# Altium PCB PCB1.PcbDoc (part 1 of 2)
Units mm, origin at the board's own origin, x right, y up, seen from the top; angles counter-clockwise.
Board outline 150 x 44.29 mm, 2 copper layers (Component Side, Solder Side), stack 0.772 mm thick; 82 components, 158 nets, 515 pads, 151 vias.
Unrouted connection lines stored in the file: 1.
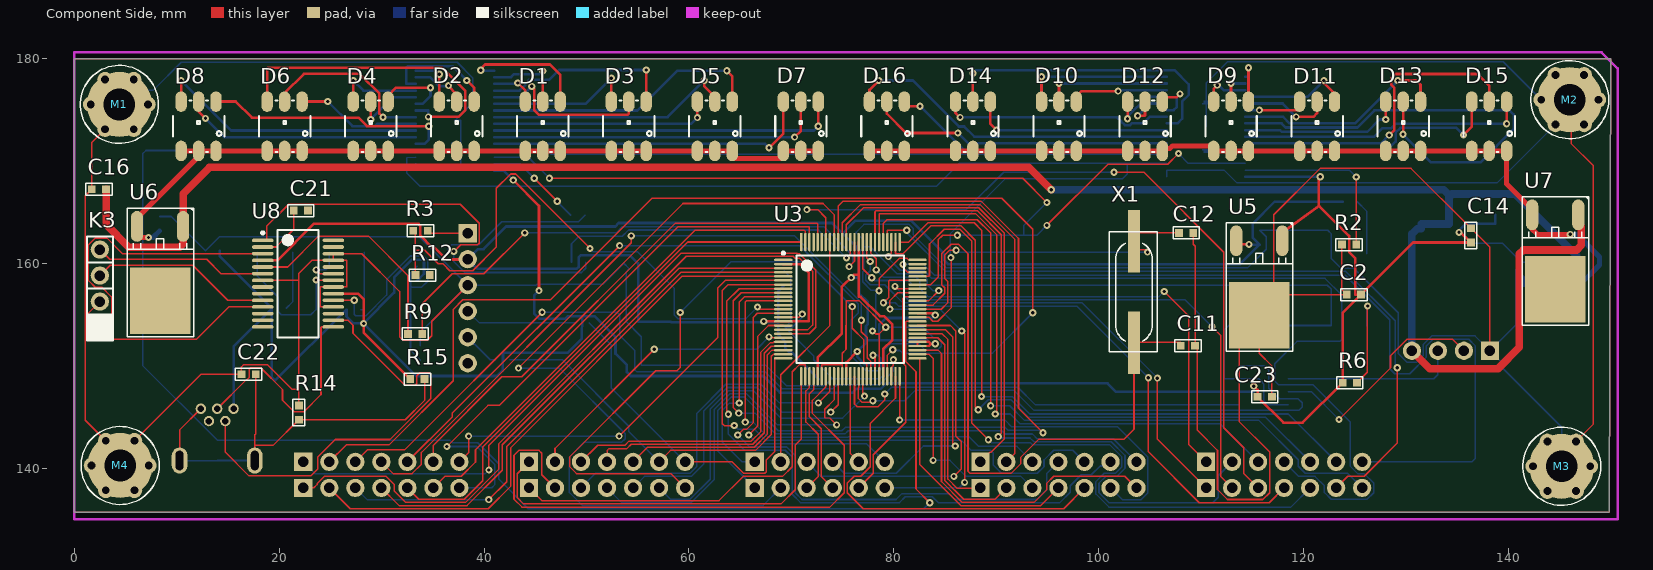
[diagram p0: Component Side view]
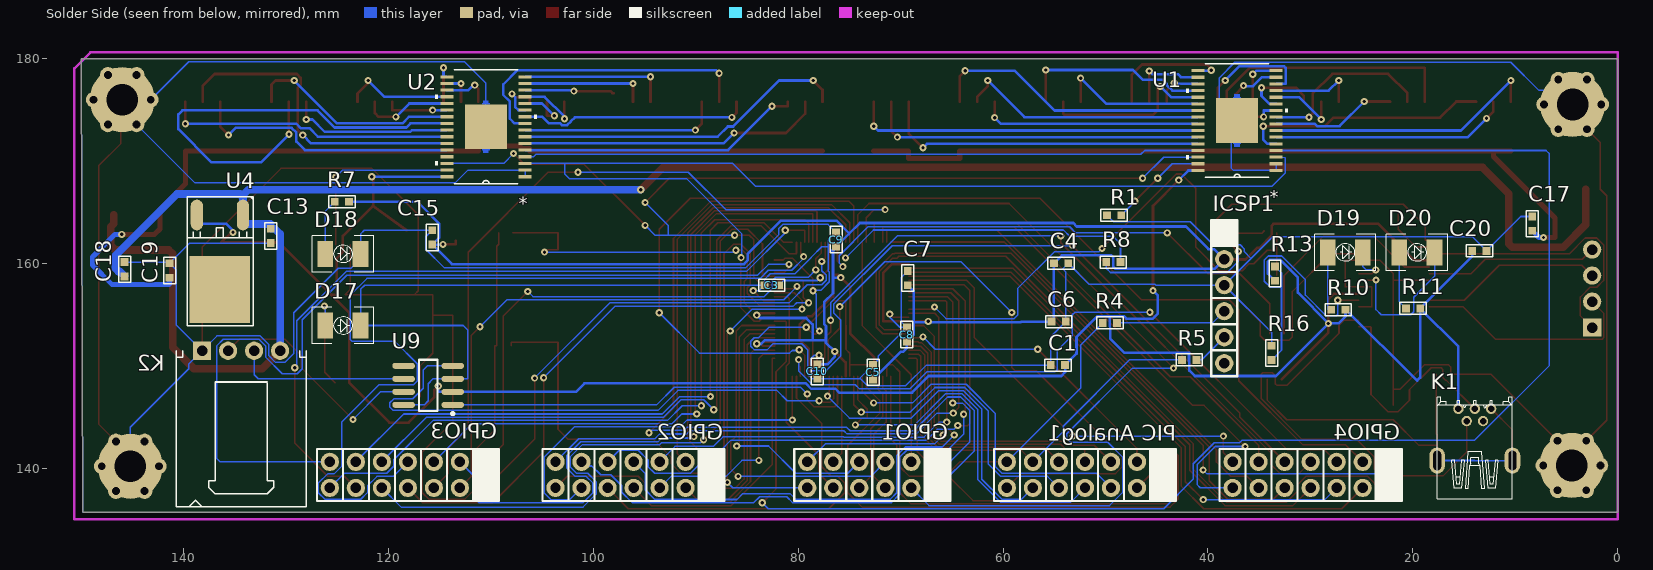
[diagram p1: Solder Side view, seen from below]

## Layer stack, top to bottom
Top Solder: solder mask 0.0102, Solder Resist, Dk 3.5
Component Side: signal copper 0.0356
Dielectric 1: core 0.32, FR-4, Dk 4.454
Dielectric 3: core 0.127, FR-4, Dk 4.454
Dielectric 4: core 0.254, FR-4, Dk 4.454
Solder Side: signal copper 0.0356
Bottom Solder: solder mask 0.0102, Solder Resist, Dk 3.5

## Board outline
0,180 150,180 149.86,135.712 0,135.712

## Design rules (kind name [scope] priority, off if disabled: settings)
AcuteAngle [All] p1: minimum=6.00000000000000E+0001 checktracksonly=FALSE
Clearance [All] p1: gap=0.152
FanoutControl Fanout_Default [All] p5: bgadir=Out bgaviamode=Centered fanoutstyle=Auto fanoutdirection=InThenOut viagrid=0.025 // Fanout_Default (Default Rule)
HoleSize [All] p1: absolutevalues=TRUE maxlimit=4 minlimit=0.152 maxpercent=80.000 minpercent=20.000
MinimumAnnularRing [All] p1: minimumring=0.178
MinimumSolderMaskSliver [All] p1: minsoldermaskwidth=0.154
PolygonConnect [All] p1: connectstyle=Relief reliefconductorwidth=0.254 reliefentries=4 polygonreliefangle="90 Angle" airgapwidth=0.254
RoutingVias [All] p1: holewidth=0.33 width=0.7 viastyle="Through Hole" minholewidth=0.33 minwidth=0.7 maxholewidth=0.33 maxwidth=1
SMDNeckDown [All] p1: percent=100.000
SolderMaskExpansion [All] p1: expansion=0
UnRoutedNet [InNet('VCC')] p1:
Width Width_1 [InNetClass('LEDGnd')] p1: maxlimit=0.254 minlimit=0.254 preferedwidth=0.254
Width LED2 [InNet('LEDPWR1')] p2: maxlimit=0.5 minlimit=0.254 preferedwidth=0.5
Width LED1 [InNet('LEDPWR2')] p3: maxlimit=0.5 minlimit=0.254 preferedwidth=0.5
Width "Input Power" [InNetClass('InputPower')] p4: maxlimit=0.75 minlimit=0.254 preferedwidth=0.75
Width "PIC Power Class" [InNetClass('PICPower')] p5: maxlimit=0.208 minlimit=0.208 preferedwidth=0.208
Width "Power class" [InNetClass('Power')] p6: maxlimit=0.254 minlimit=0.2 preferedwidth=0.254
Width [All] p7: maxlimit=0.5 minlimit=0.152 preferedwidth=0.152
25 further rules are at their usual default settings.

## Classes and differential pairs
net class LEDGnd: NetD1_4 NetD1_5 NetD1_6 NetD2_4 NetD2_5 NetD2_6 NetD3_4 NetD3_5 NetD3_6 NetD4_4 NetD4_5 NetD4_6 NetD5_4 NetD5_5 NetD5_6 NetD6_4 NetD6_5 NetD6_6 NetD7_4 NetD7_5 NetD7_6 NetD8_4 NetD8_5 NetD8_6 NetD9_4 NetD9_5 NetD9_6 NetD10_4 NetD10_5 NetD10_6 NetD11_4 NetD11_5 NetD11_6 NetD12_4 NetD12_5 NetD12_6 NetD13_4 NetD13_5 NetD13_6 NetD14_4 NetD14_5 NetD14_6 NetD15_4 NetD15_5 NetD15_6 NetD16_4 NetD16_5 NetD16_6
component class PIC32: C3 C4 C5 C6 C7 C8 C9 C10 C11 C12 GPIO1 GPIO2 GPIO3 GPIO4 ICSP1 "PIC Analog1" R3 R4 R5 U3 X1
net class Power: 3V3 LEDPWR1 LEDPWR2 VCC
net class InputPower: INPUTPOWER
component class USB_UART: C20 C21 C22 D19 D20 K1 K3 R8 R9 R10 R11 R12 R13 R14 R15 R16 TP5 TP6 TP7 U8
component class PowerSupply: C13 C14 C15 C16 C17 C18 C19 D17 D18 R6 R7 TP1 TP2 TP3 TP4 U4 U5 U6 U7
component class CanTransceiver: C23 K2 U9
component class "LED Driver": C1 C2 D1 D2 D3 D4 D5 D6 D7 D8 D9 D10 D11 D12 D13 D14 D15 D16 R1 R2 U1 U2
component class mechanical: M1 M2 M3 M4

## Components (designator, comment, footprint, x,y, rotation, side; value= is the part's Value field where it differs from the comment)
C1 "10uF" 0603C-GENERIC 53.95,150.089 r0 bottom
C2 "10uF" 0603C-GENERIC 125.628,156.972 r180 top
C3 "10uF" 0603C-GENERIC 81.89,157.886 r0 bottom
C4 "1uF" 0603C-GENERIC 55.042,160.02 r180 bottom
C5 "1uF" 0603C-GENERIC 72.695,148.692 r90 bottom
C6 "1uF" 0603C-GENERIC 55.27,154.33 r180 bottom
C7 "1uF" 0603C-GENERIC 69.317,157.886 r90 bottom
C8 "1uF" 0603C-GENERIC 69.393,152.375 r90 bottom
C9 "1uF" 0603C-GENERIC 76.302,161.646 r90 bottom
C10 "1uF" 0603C-GENERIC 78.13,150.165 r270 bottom
C11 "1nF" 0603C-GENERIC 108.026,151.968 r0 top
C12 "1nF" 0603C-GENERIC 107.848,162.992 r0 top
C13 "1nF" 0603C-GENERIC 131.496,163.398 r270 bottom
C14 "1nF" 0603C-GENERIC 136.347,162.052 r90 top
C15 "1nF" 0603C-GENERIC 115.722,161.849 r90 bottom
C16 "1nF" 0603C-GENERIC 3.099,167.259 r180 top
C17 "1nF" 0603C-GENERIC 8.331,163.195 r90 bottom
C18 "1nF" 0603C-GENERIC 145.771,158.75 r90 bottom
C19 "1nF" 0603C-GENERIC 141.376,158.623 r90 bottom
C20 "1nF" 0603C-GENERIC 14.199,161.239 r180 bottom
C21 "1nF" 0603C-GENERIC 21.412,165.176 r0 top
C22 "1nF" 0603C-GENERIC 17.704,149.2 r180 top
C23 "1nF" 0603C-GENERIC 115.519,146.99 r0 top
D1 "LED" LED-TRICOLOR-5050 45.727,173.397 r90 top
D2 "LED" LED-TRICOLOR-5050 37.327,173.397 r90 top
D3 "LED" LED-TRICOLOR-5050 54.127,173.397 r90 top
D4 "LED" LED-TRICOLOR-5050 28.927,173.397 r90 top
D5 "LED" LED-TRICOLOR-5050 62.527,173.397 r90 top
D6 "LED" LED-TRICOLOR-5050 20.527,173.397 r90 top
D7 "LED" LED-TRICOLOR-5050 70.927,173.397 r90 top
D8 "LED" LED-TRICOLOR-5050 12.127,173.397 r90 top
D9 "LED" LED-TRICOLOR-5050 112.927,173.397 r90 top
D10 "LED" LED-TRICOLOR-5050 96.127,173.397 r90 top
D11 "LED" LED-TRICOLOR-5050 121.327,173.397 r90 top
D12 "LED" LED-TRICOLOR-5050 104.527,173.397 r90 top
D13 "LED" LED-TRICOLOR-5050 129.727,173.397 r90 top
D14 "LED" LED-TRICOLOR-5050 87.727,173.397 r90 top
D15 "LED" LED-TRICOLOR-5050 138.127,173.397 r90 top
D16 "LED" LED-TRICOLOR-5050 79.327,173.397 r90 top
D17 "TOPLED-GREEN" TOPLED-GREEN 126.162,153.949 r180 bottom
D18 "TOPLED-GREEN" TOPLED-GREEN 126.162,160.949 r180 bottom
D19 "TOPLED-RED" TOPLED-RED 28.305,161.094 r180 bottom
D20 "TOPLED-RED" TOPLED-RED 21.305,161.094 r180 bottom
GPIO1 "HEADER-2X6" HEADER-2X6 66.421,140.64 r270 bottom
GPIO2 "HEADER 2X7" HEADER-2X7#1 88.456,138.1 r90 bottom
GPIO3 "HEADER 2X7" HEADER-2X7#2 110.49,140.64 r270 bottom
GPIO4 "HEADER 2X7" HEADER-2X7#1 22.352,138.1 r90 bottom
ICSP1 "HEADER-1X6" HEADER-1X6 38.405,162.966 r180 bottom
K1 "H2960" usb-mini-b 15.545,145.821 r90 bottom
K2 "CGRID4-H" CGRID-4H 138.201,151.486 r270 bottom
K3 "HEADER-1X4" HEADER-1X4 2.489,153.746 r180 top
M1 "M" MOUNTING 4.394,175.539 r0 top
M2 "M" MOUNTING 146,176 r0 top
M3 "M" MOUNTING 145.212,140.208 r0 top
M4 "M" MOUNTING 4.47,140.284 r0 top
"PIC Analog1" "HEADER 2X7" HEADER-2X7#2 44.386,140.64 r270 bottom
R1 "1230" 0603R-TBD 48.463,164.719 r0 bottom
R2 "1230" 0603R-TBD 125.146,161.849 r180 top
R3 "50" 0603R-TBD 34.493,163.195 r180 top
R4 "50" 0603R-TBD 50.267,154.203 r180 bottom
R5 "50" 0603R-TBD 41.123,150.597 r0 bottom
R6 "1K" 0603R-1k 123.825,148.361 r0 top
R7 "1K" 0603R-1k 123.85,166.04 r0 bottom
R8 "1K" 0603R-1k 49.936,160.147 r180 bottom
R9 "1K" 0603R-1k 32.575,153.137 r0 top
R10 "1K" 0603R-1k 27.965,155.499 r180 bottom
R11 "1K" 0603R-1k 20.676,155.626 r180 bottom
R12 "1K" 0603R-1k 34.696,158.877 r180 top
R13 "4.7k" 0603R-1k 33.452,158.318 r90 bottom
R14 "1K" 0603R-1k 21.92,144.755 r90 top
R15 "1K" 0603R-1k 32.791,148.717 r0 top
R16 "10k" 0603R-1k 33.782,150.571 r90 bottom
U1 "TLC5947_DAP_32" DAP32_4P36X4P11 37.16,173.965 r0 bottom
U2 "TLC5947_DAP_32" DAP32_4P36X4P11 110.49,173.355 r0 bottom
U3 "PIC32MX795F512L-80I/PT" TQFP-PT100_N 75.768,155.55 r0 top
U4 "L7805" DPAK 134.214,164.744 r270 bottom
U5 "LF33CDT" DPAK 117.932,162.23 r270 top
U6 "L7805" DPAK 10.617,163.627 r270 top
U7 "L7805" DPAK 146.822,164.753 r270 top
U8 "FT232RL-Tray" SSOP-28_N 21.844,158.039 r0 top
U9 "MCP2551T-I/SN" SOIC-SN8_N 116.129,148.107 r0 bottom
X1 "CRYSTAL-GENERIC" XTAL-RU49/4 103.454,152.286 r90 top

## Footprints (in the part's own frame and the unit in brackets; to place one, negate y for a bottom-side part, rotate by r counter-clockwise, add the part's x,y. Pads: shape width x height; smd on the part's side, far side on the other; paste and mask are expansions set on the pad)
0603C-GENERIC [mil] "CAPACITOR 0603"
  rect 30x30 smd: 1(0,0) 2(55,0)
  silkscreen extent -23,-23 78,23, body extent -4,-15 59,15, height 19
0603R-1k [mil] "RESISTOR 0603"
  rect 30x30 smd: 1(0,0) 2(55,0)
  silkscreen extent -23,-23 78,23, body extent -4,-15 59,15, height 20
0603R-TBD [mil] "RESISTOR 0603 VALUE TO BE DETERMINED"
  rect 30x30 smd: 1(0,0) 2(55,0)
  silkscreen extent -23,-23 78,23, body extent -4,-15 59,15, height 20
CGRID-4H [mil]
  rect 70x70 hole 40: 1(0,0)
  round 70 hole 40: 2(0,100) 3(0,200) 4(0,300)
  silkscreen extent 0,-100 600,400
DAP32_4P36X4P11 [mil]
  rect 50x12 smd: 1(-150.5,191.93) 2(-150.5,166.34) 3(-150.5,140.75) 4(-150.5,115.16) 5(-150.5,89.57) 6(-150.5,63.98) 7(-150.5,38.39) 8(-150.5,12.8) 9(-150.5,-12.8) 10(-150.5,-38.39) 11(-150.5,-63.98) 12(-150.5,-89.57) 13(-150.5,-115.16) 14(-150.5,-140.75) 15(-150.5,-166.34) 16(-150.5,-191.93) 17(150.5,-191.93) 18(150.5,-166.34) 19(150.5,-140.75) 20(150.5,-115.16) 21(150.5,-89.57) 22(150.5,-63.98) 23(150.5,-38.39) 24(150.5,-12.8) 25(150.5,12.8) 26(150.5,38.39) 27(150.5,63.98) 28(150.5,89.57) 29(150.5,115.16) 30(150.5,140.75) 31(150.5,166.34) 32(150.5,191.93)
  rect 161.81x171.65 smd: 33(0,0)
  Component Side region: 13.78,-85.83 -13.78,-85.83 -13.78,-89.76 -9.84,-89.76 -9.84,-100.39 9.84,-100.39 9.84,-89.76 13.78,-89.76
  Component Side region: 13.78,85.83 -13.78,85.83 -13.78,89.76 -9.84,89.76 -9.84,100.39 9.84,100.39 9.84,89.76 13.78,89.76
  silkscreen extent -196,-218 196,218
DPAK [mm]
  oval 3x1.2 smd: 1(0,0) 3(0,-4.5)
  rect 6.5x5.9 smd: 2(7.275,-2.25)
  silkscreen extent -1.78,-5.46 10.79,1.02, body extent -0.5,-5.48 9.44,1.06, height 2.41
HEADER-1X4 [mil]
  rect 70x70 hole 40: 1(0,0)
  round 70 hole 40: 2(0,-100) 3(0,-200) 4(0,-300)
  silkscreen extent -51,-350 50,50, body extent -50,-350 50,50, height 470
HEADER-1X6 [mil]
  rect 70x70 hole 40: 1(0,0)
  round 70 hole 40: 2(0,-100) 3(0,-200) 4(0,-300) 5(0,-400) 6(0,-500)
  silkscreen extent -50,-550 50,50, body extent -50,-550 50,50, height 470
HEADER-2X6 [mil]
  rect 70x70 hole 40: 1(0,0) 2(100,0)
  round 70 hole 40: 3(0,-100) 4(100,-100) 5(0,-200) 6(100,-200) 7(0,-300) 8(100,-300) 9(0,-400) 10(100,-400) 11(0,-500) 12(100,-500)
  silkscreen extent -50,-550 150,50, body extent -50,-550 150,50, height 470
HEADER-2X7#1 [mil]
  rect 70x70 hole 40: 1(0,0) 2(100,0)
  round 70 hole 40: 3(0,100) 4(100,100) 5(0,200) 6(100,200) 7(0,300) 8(100,300) 9(0,400) 10(100,400) 11(0,500) 12(100,500) 13(0,600) 14(100,600)
  silkscreen extent -50,-50 150,650, body extent -50,-50 150,650, height 470
HEADER-2X7#2 [mil]
  rect 70x70 hole 40: 1(0,0) 2(100,0)
  round 70 hole 40: 3(0,-100) 4(100,-100) 5(0,-200) 6(100,-200) 7(0,-300) 8(100,-300) 9(0,-400) 10(100,-400) 11(0,-500) 12(100,-500) 13(0,-600) 14(100,-600)
  silkscreen extent -50,-650 150,50, body extent -50,-650 150,50, height 470
LED-TRICOLOR-5050 [mil]
  rrect100% 79x44 smd: 1(-94.49,-67) 2(-94.49,0) 3(-94.49,66.93) 4(95,66.93) 5(95,0) 6(95,-67)
  silkscreen extent -98,-99 99,98
MOUNTING [mil]
  round 250 hole 122.05: 1(0,0)
  round 60 hole 30: 2(-55,95.26) 3(55,95.26) 4(110,0) 5(55,-95.26) 6(-55,-95.26) 7(-110,0)
  silkscreen extent -150,-150 150,150
SOIC-SN8_N [mm] "SOIC, 8-Leads, Body 4.9x3.8mm, Pitch 1.27mm, IPC Medium Density"
  oval 2.2x0.6 smd: 1(-2.4,1.905) 2(-2.4,0.635) 3(-2.4,-0.635) 4(-2.4,-1.905) 5(2.4,-1.905) 6(2.4,-0.635) 7(2.4,0.635) 8(2.4,1.905)
  silkscreen extent -2.52,-2.5 0.9,2.88, body extent -2,-2.5 2,2.5, height 1.75
SSOP-28_N [mm] "SOP, 28-Leads, Body 10.2x5.3mm, Pitch 0.65mm, IPC Medium Density"
  oval 2.1x0.35 smd: 1(-3.45,4.225) 2(-3.45,3.575) 3(-3.45,2.925) 4(-3.45,2.275) 5(-3.45,1.625) 6(-3.45,0.975) 7(-3.45,0.325) 8(-3.45,-0.325) 9(-3.45,-0.975) 10(-3.45,-1.625) 11(-3.45,-2.275) 12(-3.45,-2.925) 13(-3.45,-3.575) 14(-3.45,-4.225) 15(3.45,-4.225) 16(3.45,-3.575) 17(3.45,-2.925) 18(3.45,-2.275) 19(3.45,-1.625) 20(3.45,-0.975) 21(3.45,-0.325) 22(3.45,0.325) 23(3.45,0.975) 24(3.45,1.625) 25(3.45,2.275) 26(3.45,2.925) 27(3.45,3.575) 28(3.45,4.225)
  silkscreen extent -3.57,-5.25 2,5.25, body extent -2.8,-5.25 2.8,5.25, height 2
TOPLED-GREEN [mil]
  rect 60x100 smd: A(0,0) K(135,0)
  silkscreen extent -50,-70 185,70, body extent -20,-60 154,60, height 75
TOPLED-RED [mil]
  rect 60x100 smd: A(0,0) K(135,0)
  silkscreen extent -50,-70 185,70, body extent -20,-60 154,60, height 75
TQFP-PT100_N [mm] "Thin QFP, 100-Leads, Body 12x12mm, Pitch 0.4mm, IPC Medium Density"
  oval 1.8x0.24 smd: 1(-6.55,4.8) 2(-6.55,4.4) 3(-6.55,4) 4(-6.55,3.6) 5(-6.55,3.2) 6(-6.55,2.8) 7(-6.55,2.4) 8(-6.55,2) 9(-6.55,1.6) 10(-6.55,1.2) 11(-6.55,0.8) 12(-6.55,0.4) 13(-6.55,0) 14(-6.55,-0.4) 15(-6.55,-0.8) 16(-6.55,-1.2) 17(-6.55,-1.6) 18(-6.55,-2) 19(-6.55,-2.4) 20(-6.55,-2.8) 21(-6.55,-3.2) 22(-6.55,-3.6) 23(-6.55,-4) 24(-6.55,-4.4) 25(-6.55,-4.8) 51(6.55,-4.8) 52(6.55,-4.4) 53(6.55,-4) 54(6.55,-3.6) 55(6.55,-3.2) 56(6.55,-2.8) 57(6.55,-2.4) 58(6.55,-2) 59(6.55,-1.6) 60(6.55,-1.2) 61(6.55,-0.8) 62(6.55,-0.4) 63(6.55,0) 64(6.55,0.4) 65(6.55,0.8) 66(6.55,1.2) 67(6.55,1.6) 68(6.55,2) 69(6.55,2.4) 70(6.55,2.8) 71(6.55,3.2) 72(6.55,3.6) 73(6.55,4) 74(6.55,4.4) 75(6.55,4.8)
  oval 0.24x1.8 smd: 26(-4.8,-6.55) 27(-4.4,-6.55) 28(-4,-6.55) 29(-3.6,-6.55) 30(-3.2,-6.55) 31(-2.8,-6.55) 32(-2.4,-6.55) 33(-2,-6.55) 34(-1.6,-6.55) 35(-1.2,-6.55) 36(-0.8,-6.55) 37(-0.4,-6.55) 38(0,-6.55) 39(0.4,-6.55) 40(0.8,-6.55) 41(1.2,-6.55) 42(1.6,-6.55) 43(2,-6.55) 44(2.4,-6.55) 45(2.8,-6.55) 46(3.2,-6.55) 47(3.6,-6.55) 48(4,-6.55) 49(4.4,-6.55) 50(4.8,-6.55) 76(4.8,6.55) 77(4.4,6.55) 78(4,6.55) 79(3.6,6.55) 80(3.2,6.55) 81(2.8,6.55) 82(2.4,6.55) 83(2,6.55) 84(1.6,6.55) 85(1.2,6.55) 86(0.8,6.55) 87(0.4,6.55) 88(0,6.55) 89(-0.4,6.55) 90(-0.8,6.55) 91(-1.2,6.55) 92(-1.6,6.55) 93(-2,6.55) 94(-2.4,6.55) 95(-2.8,6.55) 96(-3.2,6.55) 97(-3.6,6.55) 98(-4,6.55) 99(-4.4,6.55) 100(-4.8,6.55)
  silkscreen extent -6.67,-5.25 5.25,5.59, body extent -6,-6 6,6, height 1.2
usb-mini-b [mil]
  round 40 hole 25: 1(0,0) 2(-47.24,-31.5) 3(0,-62.99) 4(-47.24,-94.49) 5(0,-125.98)
  oval 100x60 hole 30 slot 75 at 0 deg: M1(-198.82,-207.68) M2(-198.82,81.69)
  silkscreen extent -348,-207 44,82, body extent -345,-214 9,89, height 162
XTAL-RU49/4 [mil]
  rect 240x47.24 smd: 1(0,0) 2(390,0)
  silkscreen extent -35,-90 425,95, body extent -78,-90 468,95, height 120

## Part data
C1 C2: library part 0603C-10UF-10V-X5R-TDK, "CAPACITOR 0603 CERAMIC"
C3 C4 C5 C6 C7 C8 C9 C10: library part 0603C-1UF-35V-X5R-TAY, "CAPACITOR 0603 CERAMIC"
C11 C12 C13 C14 C15 C16 C17 C18 C19 C20 C21 C22 C23: library part 0603C-000, "CAPACITOR 0603 CERAMIC"
D1 D2 D3 D4 D5 D6 D7 D8 D9 D10 D11 D12 D13 D14 D15 D16: library part "RGB LED"
GPIO2 GPIO3 GPIO4 "PIC Analog1": library part HEADER-2X7
K1: library part USB-H2960, "MINI USB B DEVICE CONNECTOR"
K2: "MOLEX GC/WALDOM CGRID CONNECTOR 4 PIN"
M1 M2 M3 M4: library part MOUNTING, "MOUNTING HOLE - NON INSTALLABLE"
R1 R2 R3 R4 R5: library part 0603R-TBD, "RESISTOR 0603 VALUE TO BE DETERMINED"
R6 R7 R8 R9 R10 R11 R12 R13 R14 R15 R16: library part 0603R-1K, "GENERIC RESISTOR 0603"
U1 U2: "Imported"
U3: "High Performance 80 MHz MIPS-Based 32-Bit Flash Microcontroller with USB, CAN and Ethernet, 512KB Program Memory, 100-pin TQFP, Industrial Temperature"
U4 U6 U7: library part L7805-DPAK, "LINEAR REGULATOR 5.0V"
U5: "Low Drop Voltage Regulator 3.3V"
U8: "USB UART Asynchronous Serial Data Transfer Chip, SSOP-28, Tray"
U9: "High-Speed CAN Transceiver, 8-Pin SOIC, Industrial Temperature, Tape and Reel"
X1: "GENERIC CRYSTAL"

## Via types
v1: diameter 0.7, hole 0.33, Component Side to Solder Side, 151 vias

## Nets (pads, with @x,y where several pads share a name; then routed paths per layer and width w, separated by ;. In a path a pad name is that pad's centre, name@x,y a point inside that pad or via, vN(x,y) a via of type N, cw(c..) or ccw(c..) an arc to the next point about the centre after c; other vN are vias at no path point)
3V3: C4.1 C5.1 C6.1 C7.1 C8.1 C9.1 C10.1 C15.1 ICSP1.2 R7.1 U3.2 U3.16 U3.30 U3.37 U3.46 U3.54 U3.55 U3.62 U3.86 U5.3 U8.4 | length 250.7
  Component Side w0.24: v1(67.309,154.35) U3.16@69.218,154.35 71.679,154.35 ; U3.2@69.218,159.95 70.86,159.95 ; U3.30@72.568,149 72.568,150.805 ; U3.37@75.368,149 75.368,150.356 v1(76.428,151.416) ; 76.568,158.94 U3.86@76.568,162.1 ; U3.46@78.968,149 78.968,151.638 ; U3.62@82.318,155.15 83.864,155.15 v1(84.049,154.965) ; U3.54@82.318,151.95 U3.55@82.318,152.35 83.439,152.35 83.642,152.146 83.446,151.95 U3.54@82.318,151.95
  Component Side w0.254: U8.4@18.394,160.314 19.812,160.314 23.368,163.87 33.595,163.87 33.757,163.709 33.757,162.769 34.984,161.542 35.187,161.542 36.336,160.393 37.756,160.393 38.097,160.734 ICSP1.2@38.405,160.426 ; 70.86,159.95 71.715,159.095 71.715,154.386 71.679,154.35 ; 72.568,150.805 74.905,153.142 74.905,157.691 76.116,158.902 76.53,158.902 76.568,158.94 ; 76.568,159.355 76.568,158.94 ; 78.968,151.638 79.86,152.529 79.86,154.032 79.034,154.858 78.642,154.858 76.756,156.743 76.568,156.743 76.568,158.94 ; U5.3@113.432,162.23 113.432,161.874 v1(114.681,161.874)
  Solder Side w0.254: v1(67.309,154.35) v1@67.513,154.254 ; C7.1@69.317,157.886 68.732,157.302 68.732,154.254 ; C5.1@72.695,148.692 70.002,151.384 69.774,151.384 69.393,151.765 C8.1@69.393,152.375 68.732,153.035 68.732,154.254 ; v1(75.844,158.623) 76.58,158.623 ; 77.292,152.502 78.517,152.502 ; C10.1@78.13,150.165 77.165,150.165 76.428,150.902 v1(76.428,151.416) 77.276,152.264 77.292,152.248 77.292,153.903 77.472,154.082 77.472,156.235 76.605,157.101 76.605,159.392 ; v1(84.049,152.171) 83.668,152.171 83.642,152.146 83.267,152.521 78.537,152.521 78.517,152.502 ; v1(84.049,154.965) 83.769,154.686 79.228,154.686 78.593,154.051 78.593,152.578 78.517,152.502 ; v1(114.681,161.874) 114.706,161.849 C15.1@115.722,161.849 ; R7.1@123.85,166.04 117.196,166.04 115.037,163.881 115.037,162.535 C15.1@115.722,161.849 ; v1@67.513,154.254 58.299,154.254 58.222,154.33 C6.1@55.27,154.33 55.042,154.33 C4.1@55.042,160.02 54.254,160.807 49.428,160.807 49.225,160.604 49.225,159.664 49.047,159.487 39.345,159.487 ICSP1.2@38.405,160.426 39.392,161.414 39.958,161.414 42.165,163.621 52.812,163.621 53.148,163.957 73.99,163.957 75.068,162.879 ; v1@67.513,154.254 68.732,154.254 ; 75.068,162.879 75.068,162.981 76.271,164.184 81.668,164.184 84.938,160.915 84.938,160.305 85.293,159.949 113.823,159.949 C15.1@115.722,161.849 ; 75.068,162.879 C9.1@76.302,161.646 ; C9.1@76.302,161.646 76.608,161.164 ; C9.1@76.302,161.646 76.695,161.252 76.608,161.164 ; 76.605,159.392 76.608,159.394 76.608,161.164 ; 76.605,159.392 76.605,161.162 76.608,161.164
A1: "PIC Analog1.13" R4.1 U3.25 | length 38.1
  Component Side w0.152: 59.626,140.64 64.211,140.64 65.329,139.522 67.406,139.522 67.564,139.68 67.564,140.849 68.377,141.661 68.377,150.623 68.504,150.75 U3.25@69.218,150.75
  Solder Side w0.152: R4.1@50.267,154.203 52.4,152.07 52.4,147.866 59.626,140.64
A2: "PIC Analog1.11" R5.2 U3.24 | length 40
  Component Side w0.152: 57.086,140.64 58.204,141.757 66.503,141.757 68.047,143.301 68.047,150.946 68.25,151.15 U3.24@69.218,151.15
  Solder Side w0.152: R5.2@42.52,150.597 47.648,150.597 54.127,144.117 54.127,143.599 57.086,140.64
A3: "PIC Analog1.9" U3.23 | length 23.7
  Component Side w0.152: 54.546,140.64 55.969,142.062 66.37,142.062 67.666,143.358 67.666,151.105 68.111,151.55 U3.23@69.218,151.55
A4: "PIC Analog1.7" U3.22 | length 27.1
  Component Side w0.152: 52.006,140.64 52.006,141.732 52.21,141.935 53.944,141.935 54.376,142.367 66.236,142.367 67.355,143.486 67.355,151.233 68.04,151.917 68.395,151.917 68.428,151.95 U3.22@69.218,151.95
A5: "PIC Analog1.5" U3.21 | length 29.1
  Component Side w0.152: 49.466,140.64 51.092,142.265 53.752,142.265 54.159,142.672 66.091,142.672 67.031,143.612 67.031,151.359 67.92,152.248 68.199,152.248 68.301,152.35 U3.21@69.218,152.35
A6: "PIC Analog1.3" U3.20 | length 28.2
  Component Side w0.152: 46.926,140.64 46.926,141.948 v1(56.617,151.638) ; v1(67.818,152.844) 67.913,152.75 U3.20@69.218,152.75
  Solder Side w0.152: v1(56.617,151.638) 66.611,151.638 v1(67.818,152.844)
A7: "PIC Analog1.1" U3.26 | length 43.3
  Component Side w0.152: 44.386,140.64 43.231,139.484 43.231,137.147 43.841,136.537 68.998,136.537 70.383,137.922 70.383,142.291 70.968,142.876 U3.26@70.968,149
A8: "PIC Analog1.2" U3.27 | length 39.5
  Component Side w0.152: 44.386,138.1 45.631,136.855 62.941,136.855 65.303,139.217 69.139,139.217 70.079,140.157 70.079,149.428 70.79,150.139 71.368,150.114 U3.27@71.368,149
A9: "PIC Analog1.4" U3.32 | length 57.6
  Component Side w0.152: 46.926,138.1 45.644,139.382 45.644,141.491 45.374,141.76 43.393,141.76 42.926,141.293 42.926,137 43.698,136.228 73.769,136.228 75.159,137.617 75.159,142.265 72.057,145.367 72.057,146.639 73.368,147.95 U3.32@73.368,149
A10: "PIC Analog1.6" U3.33 | length 34.2
  Component Side w0.152: v1(72.637,146.393) 73.768,147.524 U3.33@73.768,149
  Solder Side w0.152: 49.466,138.1 50.889,139.522 60.095,139.522 60.757,140.184 60.757,145.365 63.598,148.207 67.027,148.207 68.841,146.393 v1(72.637,146.393)
A11: "PIC Analog1.8" U3.34 | length 38.5
  Component Side w0.152: U3.34@74.168,149 74.168,146.685 73.254,145.771 73.254,144.932 73.787,144.882 v1(74.422,144.247)
  Solder Side w0.152: 52.006,138.1 53.429,136.677 60.236,136.677 62.484,138.925 62.484,145.761 64.001,147.278 65.626,147.278 68.658,144.247 v1(74.422,144.247)
A12: "PIC Analog1.10" U3.35 | length 31.2
  Component Side w0.152: v1(73.844,145.497) 74.568,146.221 U3.35@74.568,149
  Solder Side w0.152: 54.546,138.1 55.664,139.217 60.236,139.217 61.443,140.424 61.443,145.599 63.742,147.898 66.656,147.898 69.058,145.497 v1(73.844,145.497)
A13: "PIC Analog1.12" U3.41 | length 32.9
  Component Side w0.152: U3.41@76.968,149 76.968,147.225 v1(77.14,147.053)
  Solder Side w0.152: 57.086,138.1 58.204,136.982 60.109,136.982 62.078,138.951 62.078,145.792 63.874,147.588 66.296,147.588 68.968,144.916 75.002,144.916 v1(77.14,147.053)
A14: "PIC Analog1.14" U3.42 | length 60.9
  Component Side w0.152: v1(59.157,155.219) 59.157,149.86 58.839,149.542 56.769,149.542 48.345,141.119 48.345,140.179 49.027,139.497 58.229,139.497 59.626,138.1 ; v1(75.946,155.791) 75.946,153.681 77.089,152.538 77.089,150.419 77.368,150.139 U3.42@77.368,149
  Solder Side w0.152: v1(59.157,155.219) 64.11,160.172 71.564,160.172 v1(75.946,155.791)
AC1_RXD: U3.40 U9.4 | length 56.2
  Component Side w0.152: U3.40@76.568,149 76.568,147.879 76.55,147.861 76.55,146.817 76.902,146.465 77.816,146.465 v1(77.96,146.609)
  Solder Side w0.152: v1(77.96,146.609) 81.077,146.609 82.083,147.615 91.738,147.615 93.692,145.661 119.55,145.661 119.873,145.984 119.873,146.416 119.477,146.812 117.627,146.812 116.611,147.828 116.611,149.606 116.205,150.012 U9.4@113.729,150.012
AC1_TXD: U3.39 U9.1 | length 42.2
  Component Side w0.152: U3.39@76.168,149 76.168,146.291 76.438,146.021 78.469,146.021 79.116,146.668 v1(79.116,147.263)
  Solder Side w0.152: v1(79.116,147.263) 79.781,147.927 92.104,147.927 93.829,146.202 U9.1@113.729,146.202
GND: C1.2 C2.2 C3.2 C4.2 C5.2 C6.2 C7.2 C8.2 C9.2 C10.2 C11.2 C12.2 C13.2 C14.2 C15.2 C16.2 C17.2 C18.2 C19.2 C20.2 C22.2 C23.2 D17.K D18.K ICSP1.3 K2.1 M1.1 M1.2 M1.3 M1.4 M1.5 M1.6 M1.7 M2.1 M2.2 M2.3 M2.4 M2.5 M2.6 M2.7 M3.1 M3.2 M3.3 M3.4 M3.5 M3.6 M3.7 M4.1 M4.2 M4.3 M4.4 M4.5 M4.6 M4.7 R1.2 R2.2 R14.2 R16.2 U1.1 U1.2 U1.33 U2.1 U2.2 U2.33 U3.15 U3.31 U3.36 U3.45 U3.65 U3.75 U5.2 U8.7 U8.18 U8.21 U8.25 U8.26 U9.3 U9.8 | length 834.4
  Component Side w0.152: M4.7@1.676,140.284 3.073,138.887 M4.6@3.073,137.865 ; M1.6@2.997,173.12 1.702,171.824 C16.2@1.702,167.259 1.067,166.624 1.067,144.711 M4.2@3.073,142.704 ; M1.5@5.791,173.12 5.791,174.142 M1.4@7.188,175.539 5.791,176.936 M1.3@5.791,177.959 ; M4.4@7.264,140.284 5.867,141.681 M4.3@5.867,142.704 12.363,149.2 C22.2@16.307,149.2 16.307,149.911 16.523,150.127 18.859,150.127 21.26,147.726 21.92,147.726 ; U8.7@18.394,158.364 21.92,158.364 R14.2@21.92,146.152 ; 21.92,158.369 21.92,159.037 23.197,160.314 U8.25@25.294,160.314 ; U8.18@25.294,155.764 24.028,155.764 24.01,155.782 24.01,157.696 24.028,157.714 U8.21@25.294,157.714 26.568,157.714 26.586,157.732 26.586,160.296 26.568,160.314 U8.25@25.294,160.314 ; ICSP1.3@38.405,157.886 34.887,154.368 34.887,152.946 34.457,152.516 32.095,152.516 31.75,152.861 31.75,157.277 28.063,160.964 U8.26@25.294,160.964 U8.25@25.294,160.314 ; U3.15@69.218,154.75 70.752,154.75 v1(71.069,155.067) ; U3.31@72.968,149 72.968,150.089 73.012,150.132 74.95,150.132 74.968,150.114 ; U3.36@74.968,149 74.968,150.114 ; v1(77.927,153.416) 78.223,153.12 78.568,153.12 v1(79.223,153.774) 76.609,156.388 75.362,156.388 75.336,151.613 74.968,151.244 74.968,150.114 ; 78.562,153.111 U3.45@78.568,149 ; v1(78.562,157.34) 78.562,158.521 80.552,160.511 81.296,160.511 81.458,160.35 U3.75@82.318,160.35 ; U3.65@82.318,156.35 83.388,156.35 v1(84.391,157.353) ; C12.2@109.245,162.992 109.245,161.874 109.423,161.696 C11.2@109.423,151.968 109.626,151.968 109.626,143.739 111.608,141.757 111.608,137.939 112.582,136.966 116.036,136.966 116.7,137.63 116.7,141.592 113.716,144.577 113.716,154.955 U5.2@115.682,154.955 ; C23.2@116.916,146.99 116.916,149.998 115.682,151.232 U5.2@115.682,154.955 ; R2.2@123.749,161.849 123.749,157.455 C2.2@124.231,156.972 U5.2@117.475,156.972 ; K2.1@138.201,151.486 138.201,161.595 C14.2@136.347,163.449 130.505,169.291 121.623,169.291 117.098,164.766 117.098,157.349 U5.2@117.475,156.972 ; M3.7@142.418,140.208 143.815,138.811 M3.6@143.815,137.788 ; M2.6@144.603,173.58 145.469,173.58 146.126,172.923 146.126,171.729 148.311,169.545 148.311,144.33 M3.3@146.609,142.628 146.609,141.605 M3.4@148.006,140.208 ; M2.5@147.397,173.58 148.794,174.977 M2.4@148.794,176 147.397,177.397 M2.3@147.397,178.42 ; U5.2@115.682,154.955 115.682,156.972 U5.2@117.475,156.972
  Solder Side w0.152: M1.7@1.6,175.539 M1.1@4.394,175.539 M1.4@7.188,175.539 ; M4.7@1.676,140.284 M4.1@4.47,140.284 M4.4@7.264,140.284 ; M1.6@2.997,173.12 M1.5@5.791,173.12 ; M1.2@2.997,177.959 M1.3@5.791,177.959 5.791,176.936 7.722,176.936 10.429,179.644 37.373,179.644 38.9,178.117 38.9,175.704 U1.33@37.16,173.965 37.744,173.965 37.744,169.318 37.516,169.09 U1.1@33.338,169.09 33.325,169.09 33.325,169.74 U1.2@33.338,169.74 ; M4.6@3.073,137.865 M4.5@5.867,137.865 ; M4.2@3.073,142.704 M4.3@5.867,142.704 ; C17.2@8.331,164.592 9.449,164.592 C20.2@12.802,161.239 14.173,162.611 33.68,162.611 ICSP1.3@38.405,157.886 ; R16.2@33.782,151.968 33.782,153.264 ICSP1.3@38.405,157.886 ; 35.787,160.504 36.455,161.172 36.455,161.428 36.85,161.823 39.472,161.823 41.732,164.084 49.225,164.084 R1.2@49.86,164.719 ; C7.2@69.317,159.283 69.926,158.674 69.926,154.305 C8.2@69.393,153.772 ; v1(71.069,155.067) 71.069,154.75 70.091,153.772 C8.2@69.393,153.772 ; v1(77.927,153.416) 78.232,153.721 78.232,157.01 v1(78.562,157.34) 78.499,157.404 77.787,157.404 76.962,158.229 76.962,159.181 77.089,159.308 77.089,161.646 ; v1(79.223,153.774) 82.844,153.774 83.868,152.75 84.288,152.75 84.627,152.411 84.627,151.932 84.26,151.564 83.061,151.564 82.46,152.166 79.669,152.166 79.07,151.567 79.07,149.174 78.664,148.768 C10.2@78.13,148.768 74.016,148.768 ; v1(84.391,157.353) 83.82,157.353 C3.2@83.287,157.886 ; U2.1@106.667,168.48 106.655,168.48 106.655,169.13 U2.2@106.667,169.13 112.251,169.13 113.513,167.869 138.891,167.869 M2.6@144.603,173.58 M2.5@147.397,173.58 ; U2.33@110.49,173.355 110.49,177.597 112.591,179.698 139.508,179.698 M2.7@143.206,176 M2.1@146,176 M2.4@148.794,176 ; U9.8@118.529,146.202 116.522,146.202 116.129,146.596 116.129,148.273 115.659,148.742 U9.3@113.729,148.742 112.268,148.768 112.268,153.505 112.712,153.949 D17.K@122.733,153.949 122.733,157.48 122.326,157.886 C3.2@83.287,157.886 ; C13.2@131.496,162.001 139.395,162.001 C19.2@141.376,160.02 ; M3.7@142.418,140.208 M3.1@145.212,140.208 M3.4@148.006,140.208 ; M3.6@143.815,137.788 M3.5@146.609,137.788 ; M3.2@143.815,142.628 144.533,142.628 145.212,143.307 145.212,144.025 139.497,149.74 139.497,150.19 K2.1@138.201,151.486 ; M2.2@144.603,178.42 M2.3@147.397,178.42 ; C18.2@145.771,160.147 141.376,160.147 C19.2@141.376,160.02 ; ICSP1.3@38.405,157.886 45.06,157.886 45.136,157.963 51.587,157.963 C4.2@53.645,160.02 54.153,159.512 53.873,159.182 C6.2@53.873,154.33 55.347,152.857 C1.2@55.347,150.089 67.487,150.089 69.494,148.082 73.266,148.082 73.951,148.768 74.016,148.768 ; C8.2@69.393,153.772 72.187,150.978 72.187,150.597 C5.2@72.695,150.089 74.016,148.768 ; 77.089,161.646 77.699,161.646 78.715,160.63 78.715,160.604 80.32,158.998 82.721,158.998 83.287,158.433 C3.2@83.287,157.886 ; 77.089,161.646 77.089,162.255 C9.2@76.302,163.043 77.083,163.824 81.517,163.824 81.89,163.452 81.89,162.842 85.154,159.578 114.543,159.578 116.357,161.392 116.357,162.611 C15.2@115.722,163.246 122.364,163.246 122.733,162.877 D18.K@122.733,160.949 122.733,160.477 123.673,159.537 124.919,159.537 129.261,155.196 129.261,151.211 130.12,150.351 131.034,150.351 131.699,151.016 131.699,152.108 132.524,152.933 136.754,152.933 K2.1@138.201,151.486 ; K2.1@138.201,151.486 140.741,154.026 140.741,159.385 C19.2@141.376,160.02
INPUTPOWER: C13.1 C16.1 C18.1 K2.4 U4.1 U6.1 U7.1 | length 209.5
  Component Side w0.75: C16.1@3.099,167.259 3.099,163.816 5.331,161.584 10.276,161.584 10.617,161.925 U6.1@10.617,163.627 10.617,166.814 13.203,169.4 93.185,169.4 v1(95.377,167.208) ; K2.4@130.581,151.486 132.334,149.733 138.989,149.733 141.072,151.816 141.072,160.942 141.445,161.315 146.652,161.315 147.117,161.78 147.117,163.601 146.822,163.896 U7.1@146.822,164.753
  Solder Side w0.75: v1(95.377,167.208) 133.693,167.208 134.214,166.688 134.214,166.497 ; K2.4@130.581,151.486 130.581,162.877 131.102,163.398 C13.1@131.496,163.398 131.496,163.83 131.521,163.855 134.214,163.855 U4.1@134.214,164.744 134.214,166.497 ; C18.1@145.771,158.75 146.253,159.233 146.38,159.233 146.686,159.538 146.686,160.757 140.658,166.784 134.501,166.784 134.214,166.497
LEDPWR1: C17.1 D1.1 D1.2 D1.3 D2.1 D2.2 D2.3 D3.1 D3.2 D3.3 D4.1 D4.2 D4.3 D5.1 D5.2 D5.3 D6.1 D6.2 D6.3 D7.1 D7.2 D7.3 D8.1 D8.2 D8.3 U6.3 | length 77.2
  Component Side w0.5: v1(7.239,162.544) 6.117,162.544 U6.3@6.117,163.627 6.117,164.435 12.127,170.445 D8.2@12.127,170.993 ; D8.3@10.427,170.997 10.427,170.993 11.278,170.993 11.282,170.997 D8.2@12.127,170.997 D8.2@12.127,170.993 ; D8.1@13.829,170.997 D8.1@13.829,170.993 ; D6.3@18.827,170.997 D6.3@18.827,170.993 ; D6.2@20.527,170.997 D6.2@20.527,170.993 ; D6.1@22.229,170.997 D6.1@22.229,170.993 ; D4.3@27.227,170.997 D4.3@27.227,170.993 ; D4.1@30.629,170.997 D4.1@30.629,170.993 ; D2.3@35.627,170.997 D2.3@35.627,170.993 ; D2.2@37.327,170.997 D2.2@37.327,170.993 ; D2.1@39.029,170.997 D2.1@39.029,170.993 ; D1.3@44.027,170.997 D1.3@44.027,170.993 ; D1.2@45.727,170.997 D1.2@45.727,170.993 ; D1.1@47.429,170.997 D1.1@47.429,170.993 ; D3.3@52.427,170.997 D3.3@52.427,170.993 ; D3.2@54.127,170.997 D3.2@54.127,170.993 ; D3.1@55.829,170.997 D3.1@55.829,170.993 ; D5.3@60.827,170.997 D5.3@60.827,170.993 ; D5.2@62.527,170.997 D5.2@62.527,170.993 ; D5.1@64.229,170.997 D5.1@64.229,170.993 ; D7.3@69.227,170.997 D7.3@69.227,170.993 ; D7.2@70.927,170.997 D7.2@70.927,170.993 ; D7.1@72.629,170.997 72.629,170.993 D7.2@70.927,170.993 ; D8.2@12.127,170.993 D8.1@13.829,170.993 ; D8.1@13.829,170.993 D6.3@18.827,170.993 ; D6.3@18.827,170.993 D6.2@20.527,170.993 ; D6.2@20.527,170.993 D6.1@22.229,170.993 ; D6.1@22.229,170.993 D4.3@27.227,170.993 ; D4.3@27.227,170.993 28.067,170.993 28.071,170.997 D4.2@28.927,170.997 28.927,170.993 D4.1@30.629,170.993 ; D4.1@30.629,170.993 D2.3@35.627,170.993 ; D2.3@35.627,170.993 D2.2@37.327,170.993 ; D2.2@37.327,170.993 D2.1@39.029,170.993 ; D2.1@39.029,170.993 D1.3@44.027,170.993 ; D1.3@44.027,170.993 D1.2@45.727,170.993 ; D1.2@45.727,170.993 D1.1@47.429,170.993 ; D1.1@47.429,170.993 D3.3@52.427,170.993 ; D3.3@52.427,170.993 D3.2@54.127,170.993 ; D3.2@54.127,170.993 D3.1@55.829,170.993 ; D3.1@55.829,170.993 D5.3@60.827,170.993 ; D5.3@60.827,170.993 D5.2@62.527,170.993 ; D5.2@62.527,170.993 D5.1@64.229,170.993 ; D5.1@64.229,170.993 64.229,170.242 69.227,170.242 D7.3@69.227,170.993 ; D7.3@69.227,170.993 D7.2@70.927,170.993
  Solder Side w0.5: v1(7.239,162.544) 7.68,162.544 C17.1@8.331,163.195
LEDPWR2: C19.1 D9.1 D9.2 D9.3 D10.1 D10.2 D10.3 D11.1 D11.2 D11.3 D12.1 D12.2 D12.3 D13.1 D13.2 D13.3 D14.1 D14.2 D14.3 D15.1 D15.2 D15.3 D16.1 D16.2 D16.3 U7.3 | length 89.3
  Component Side w0.5: D16.3@77.627,170.997 77.627,170.993 78.486,170.993 78.49,170.997 D16.2@79.327,170.997 79.327,170.993 D16.1@81.029,170.993 ; D16.1@81.029,170.997 D16.1@81.029,170.993 ; D14.3@86.027,170.997 D14.3@86.027,170.993 ; D14.1@89.429,170.997 D14.1@89.429,170.993 ; D10.3@94.427,170.997 D10.3@94.427,170.993 ; D10.2@96.127,170.997 D10.2@96.127,170.993 ; D10.1@97.829,170.997 D10.1@97.829,170.993 ; D12.3@102.827,170.997 D12.3@102.827,170.993 ; D9.1@114.629,170.997 D9.1@114.629,170.993 ; D11.3@119.627,170.997 D11.3@119.627,170.993 ; D11.1@123.029,170.997 D11.1@123.029,170.993 ; D13.3@128.027,170.997 D13.3@128.027,170.993 ; D13.2@129.727,170.997 D13.2@129.727,170.993 ; D13.1@131.429,170.997 D13.1@131.429,170.993 ; D15.3@136.427,170.997 D15.3@136.427,170.993 ; D15.1@139.829,170.997 D15.1@139.829,170.993 ; v1(146.05,162.85) 142.845,162.85 142.322,163.373 U7.3@142.322,164.753 142.322,165.299 139.829,167.792 D15.1@139.829,170.993 ; D16.1@81.029,170.993 D14.3@86.027,170.993 ; D14.3@86.027,170.993 86.868,170.993 86.872,170.997 D14.2@87.727,170.997 87.727,170.993 D14.1@89.429,170.993 ; D14.1@89.429,170.993 D10.3@94.427,170.993 ; D10.3@94.427,170.993 D10.2@96.127,170.993 ; D10.2@96.127,170.993 D10.1@97.829,170.993 ; D10.1@97.829,170.993 D12.3@102.827,170.993 ; D12.3@102.827,170.993 103.683,170.993 103.687,170.997 D12.2@104.527,170.997 104.527,170.993 106.229,170.993 D12.1@106.229,170.997 106.229,171.218 106.94,171.218 107.214,171.492 111.227,171.492 D9.3@111.227,170.997 111.227,170.993 112.065,170.993 112.069,170.997 D9.2@112.927,170.997 112.927,170.993 D9.1@114.629,170.993 ; D9.1@114.629,170.993 D11.3@119.627,170.993 ; D11.3@119.627,170.993 120.472,170.993 120.476,170.997 D11.2@121.327,170.997 121.327,170.993 D11.1@123.029,170.993 ; D11.1@123.029,170.993 D13.3@128.027,170.993 ; D13.3@128.027,170.993 D13.2@129.727,170.993 ; D13.2@129.727,170.993 D13.1@131.429,170.993 ; D13.1@131.429,170.993 D15.3@136.427,170.993 ; D15.3@136.427,170.993 137.287,170.993 137.291,170.997 D15.2@138.127,170.997 138.127,170.993 D15.1@139.829,170.993
  Solder Side w0.5: C19.1@141.376,158.623 141.376,157.988 141.427,157.937 146.977,157.937 148.899,159.859 148.899,160.651 146.7,162.85 v1(146.05,162.85)
MS1: GPIO2.13 U3.53 | length 36.8
  Component Side w0.152: U3.53@82.318,151.55 84.315,151.55 84.658,151.206 84.658,138.709 86.69,136.677 93.701,136.677 94.92,137.897 94.92,138.532 95.631,139.243 102.553,139.243 GPIO2.13@103.695,138.1
MS2: GPIO2.11 U3.50 | length 37.9
  Component Side w0.152: v1(80.568,144.728) U3.50@80.568,149
  Solder Side w0.152: v1(80.568,144.728) 90.849,144.728 91.504,144.074 101.845,144.074 104.817,141.101 104.817,137.621 104.153,136.957 102.299,136.957 GPIO2.11@101.155,138.1
MS3: GPIO2.9 U3.49 | length 38.3
  Component Side w0.152: U3.49@80.168,149 80.168,146.863 77.699,144.393 77.699,140.17 76.772,139.243 76.136,139.243 75.463,138.57 75.463,137.63 77.026,136.068 96.584,136.068 GPIO2.9@98.615,138.1
MS4: GPIO2.7 U3.51 | length 26.5
  Component Side w0.152: U3.51@82.318,150.75 82.544,150.75 82.544,140.379 86.55,136.373 94.348,136.373 GPIO2.7@96.075,138.1
MS5: GPIO2.5 U3.52 | length 22.5
  Component Side w0.152: U3.52@82.318,151.15 83.436,151.15 83.845,150.74 v1(83.845,140.779)
  Solder Side w0.152: v1(83.845,140.779) 85.496,140.779 87.058,139.217 92.418,139.217 GPIO2.5@93.535,138.1
MS6: GPIO2.3 U3.56 | length 23.4
  Component Side w0.152: U3.56@82.318,152.75 84.303,152.75 84.981,152.072 84.981,138.831 86.83,136.982 89.878,136.982 GPIO2.3@90.995,138.1
MS7: GPIO2.1 U3.57 | length 20.4
  Component Side w0.152: U3.57@82.318,153.15 84.716,153.15 85.286,152.58 85.286,138.958 86.195,138.049 88.405,138.049 GPIO2.1@88.456,138.1
MS8: GPIO2.2 U3.89 | length 42.2
  Component Side w0.152: U3.89@75.368,162.1 75.368,163.777 77.046,165.455 88.298,165.455 90.806,162.947 90.806,142.889 89.513,141.596 89.411,141.596 GPIO2.2@88.456,140.64
MS9: GPIO2.4 U3.90 | length 42.9
  Component Side w0.152: U3.90@74.968,162.1 74.968,163.987 76.742,165.76 88.426,165.76 91.796,162.39 91.796,141.44 GPIO2.4@90.995,140.64
MS10: GPIO2.6 U3.11 | length 45.1
  Component Side w0.152: v1(65.501,144.52) 65.501,156.255 65.595,156.35 U3.11@69.218,156.35
  Solder Side w0.152: v1(65.501,144.52) 66.261,144.52 67.723,143.058 75.538,143.058 75.556,143.076 87.374,143.076 88.306,142.144 92.031,142.144 GPIO2.6@93.535,140.64
MS11: GPIO2.8 U3.14 | length 54.4
  Component Side w0.152: v1(64.77,143.256) 65.354,143.84 65.659,143.84 66.294,144.475 66.294,154.769 66.675,155.15 U3.14@69.218,155.15
  Solder Side w0.152: v1(64.77,143.256) 65.938,142.088 69.545,142.088 70.383,141.249 70.383,137.617 71.034,136.966 80.223,136.966 80.797,137.541 85.412,137.541 85.987,136.966 94.002,136.966 94.945,137.909 94.945,139.51 GPIO2.8@96.075,140.64
MS12: GPIO2.10 U3.7 | length 59.1
  Component Side w0.152: v1(64.427,144.183) 63.442,144.183 63.262,144.363 63.262,157.371 63.841,157.95 U3.7@69.218,157.95
  Solder Side w0.152: v1(64.427,144.183) 64.77,143.84 66.386,143.84 67.476,142.75 75.839,142.75 75.857,142.768 86.563,142.768 87.574,141.757 89.459,141.757 89.713,141.503 89.713,140.335 90.526,139.522 94.018,139.522 94.666,140.17 94.666,140.83 95.618,141.783 97.472,141.783 GPIO2.10@98.615,140.64